# Altium PCB isg_cena_chip_wirebonding_board.PcbDoc
Units mil, origin at the board's own origin, x right, y up, seen from the top; angles counter-clockwise.
Board outline 2000 x 2000 mil, 4 copper layers (Top Layer, MidLayer 1, MidLayer 2, Bottom Layer), stack 23.756 mil thick; 57 components, 62 nets, 327 pads, 262 vias.
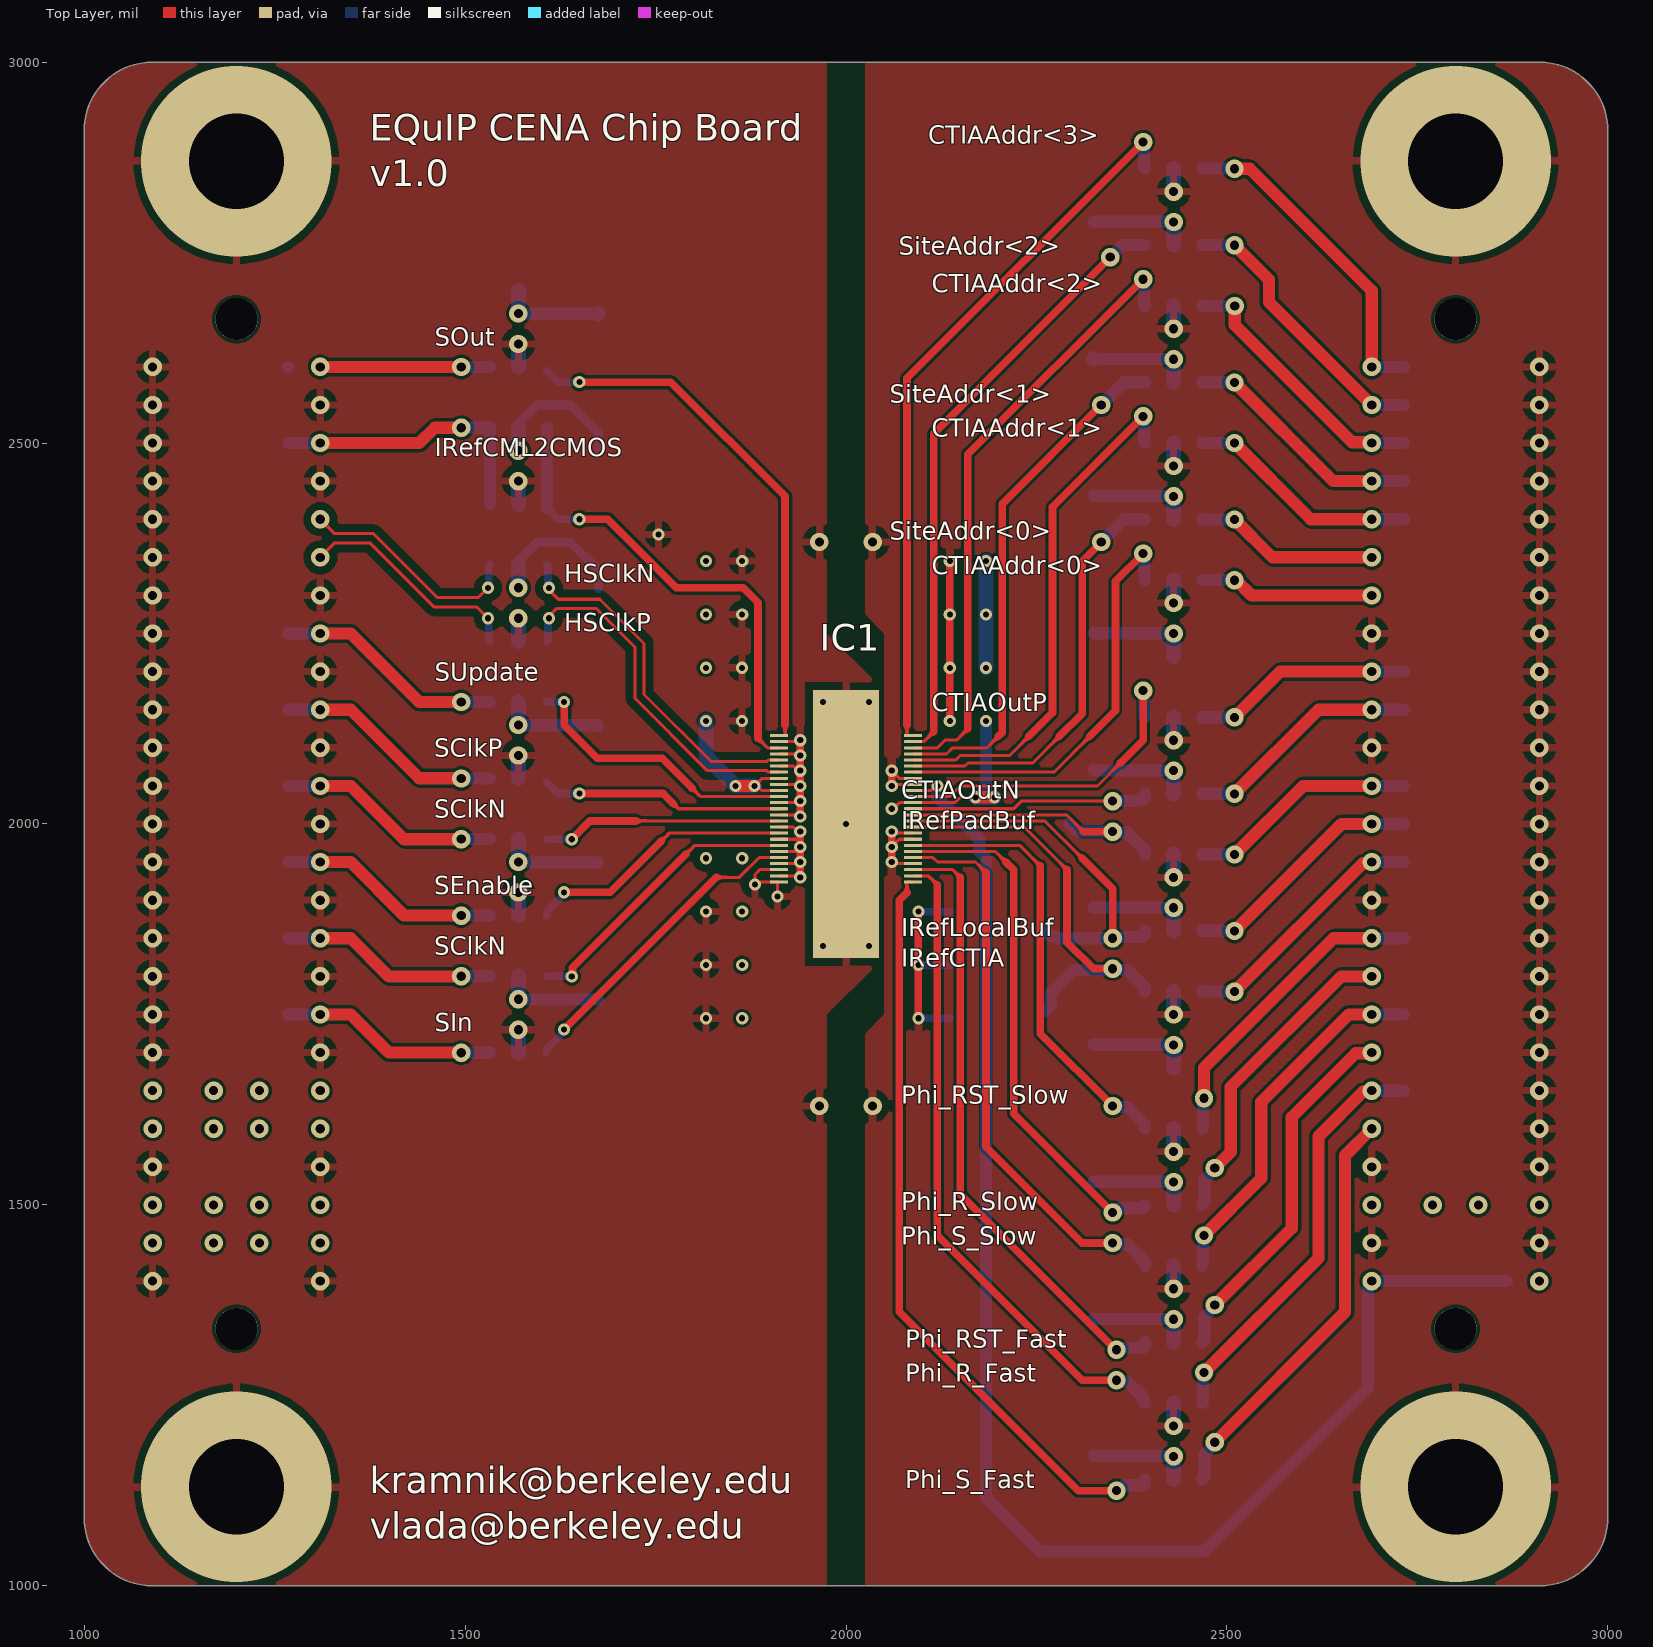
[diagram p0: Top Layer view]
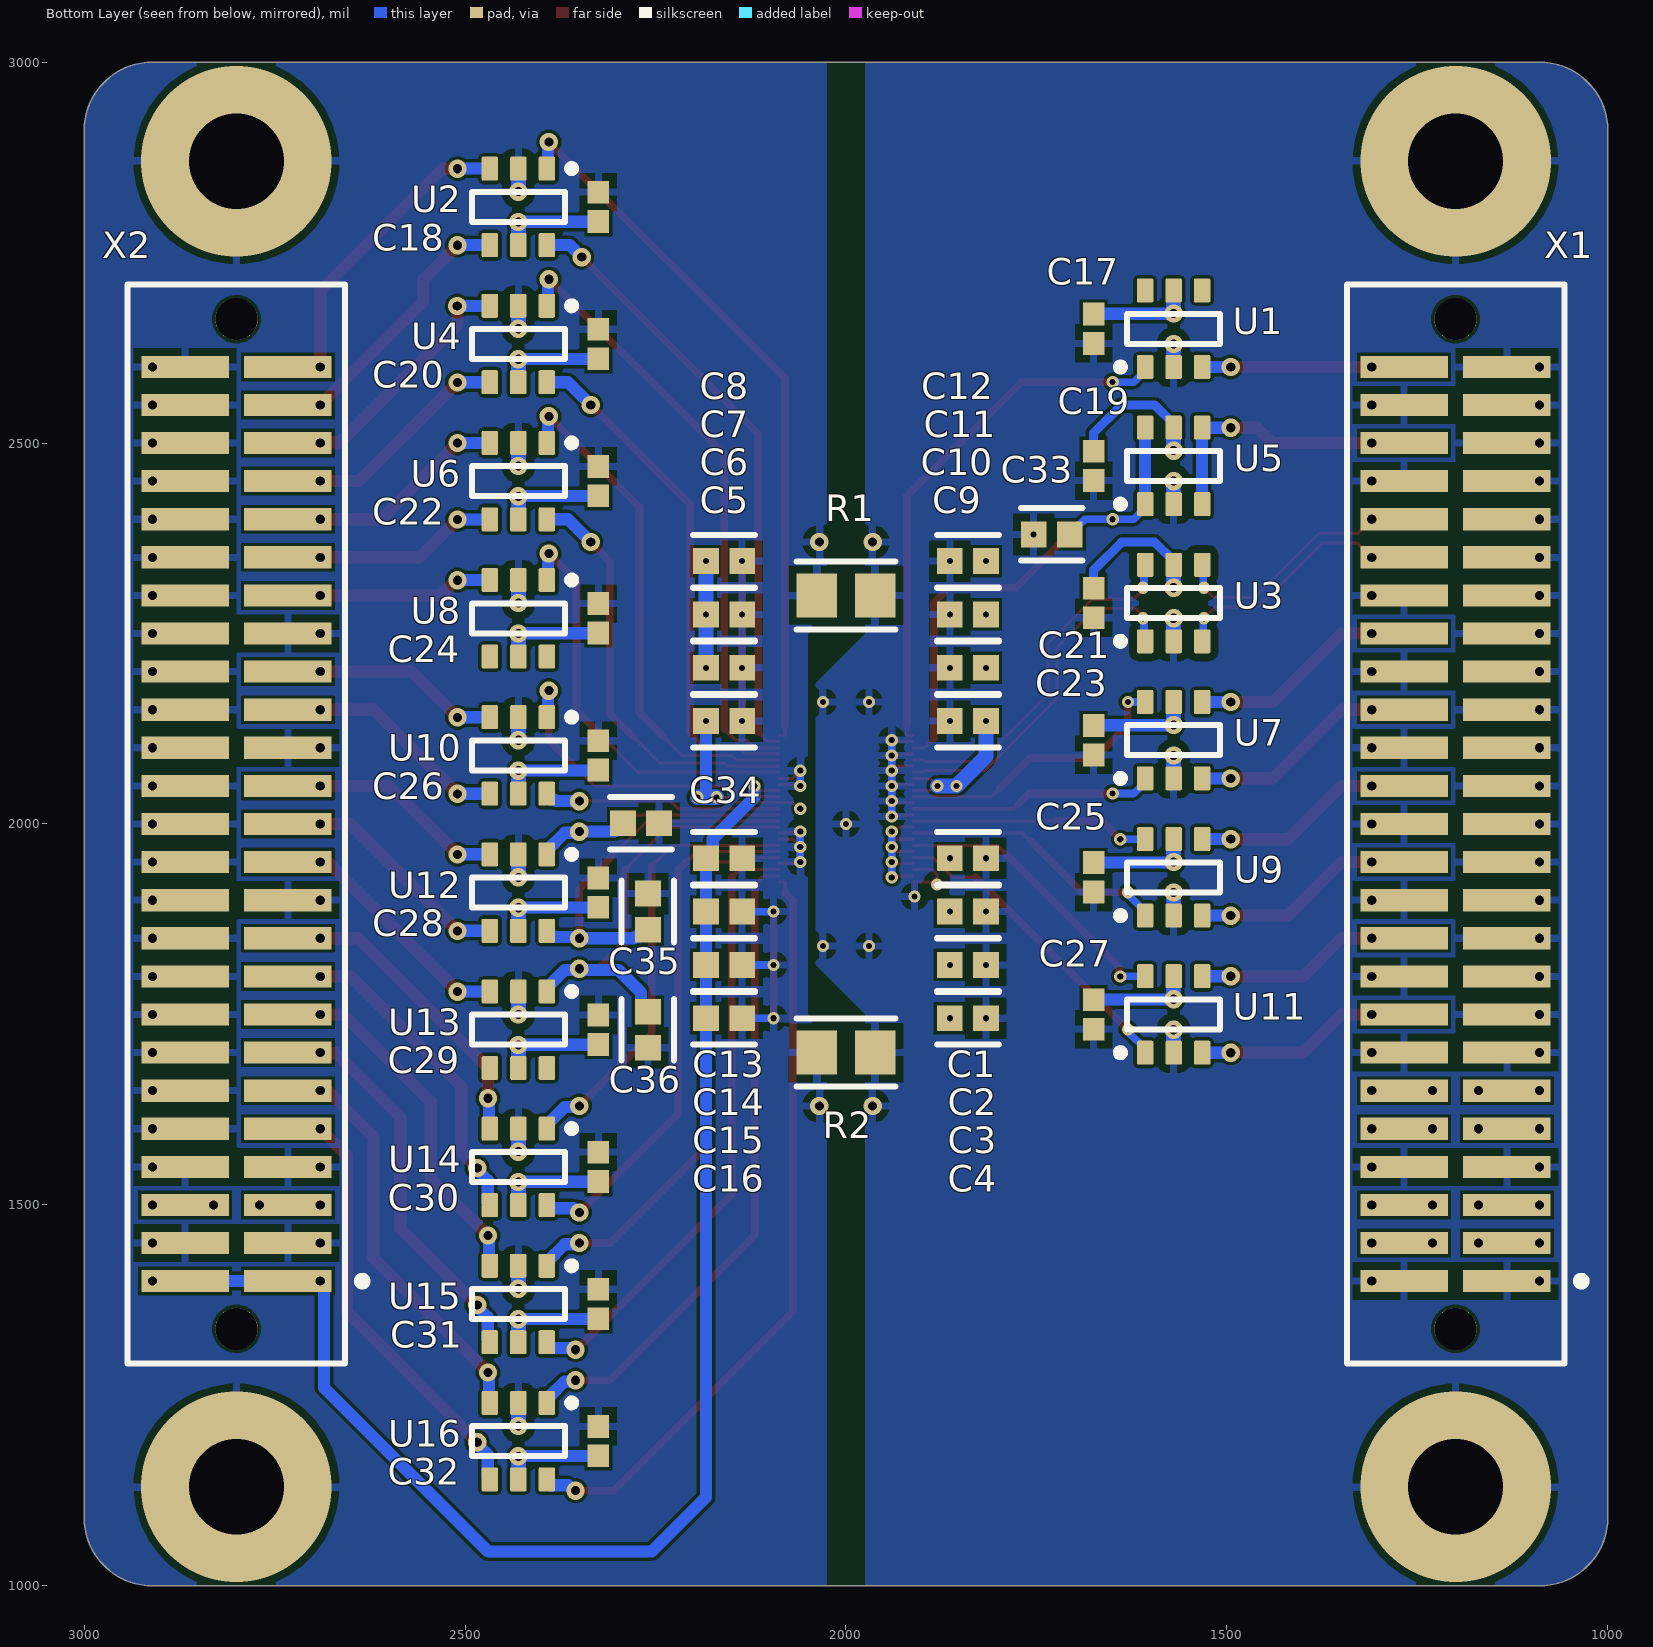
[diagram p1: Bottom Layer view, seen from below]
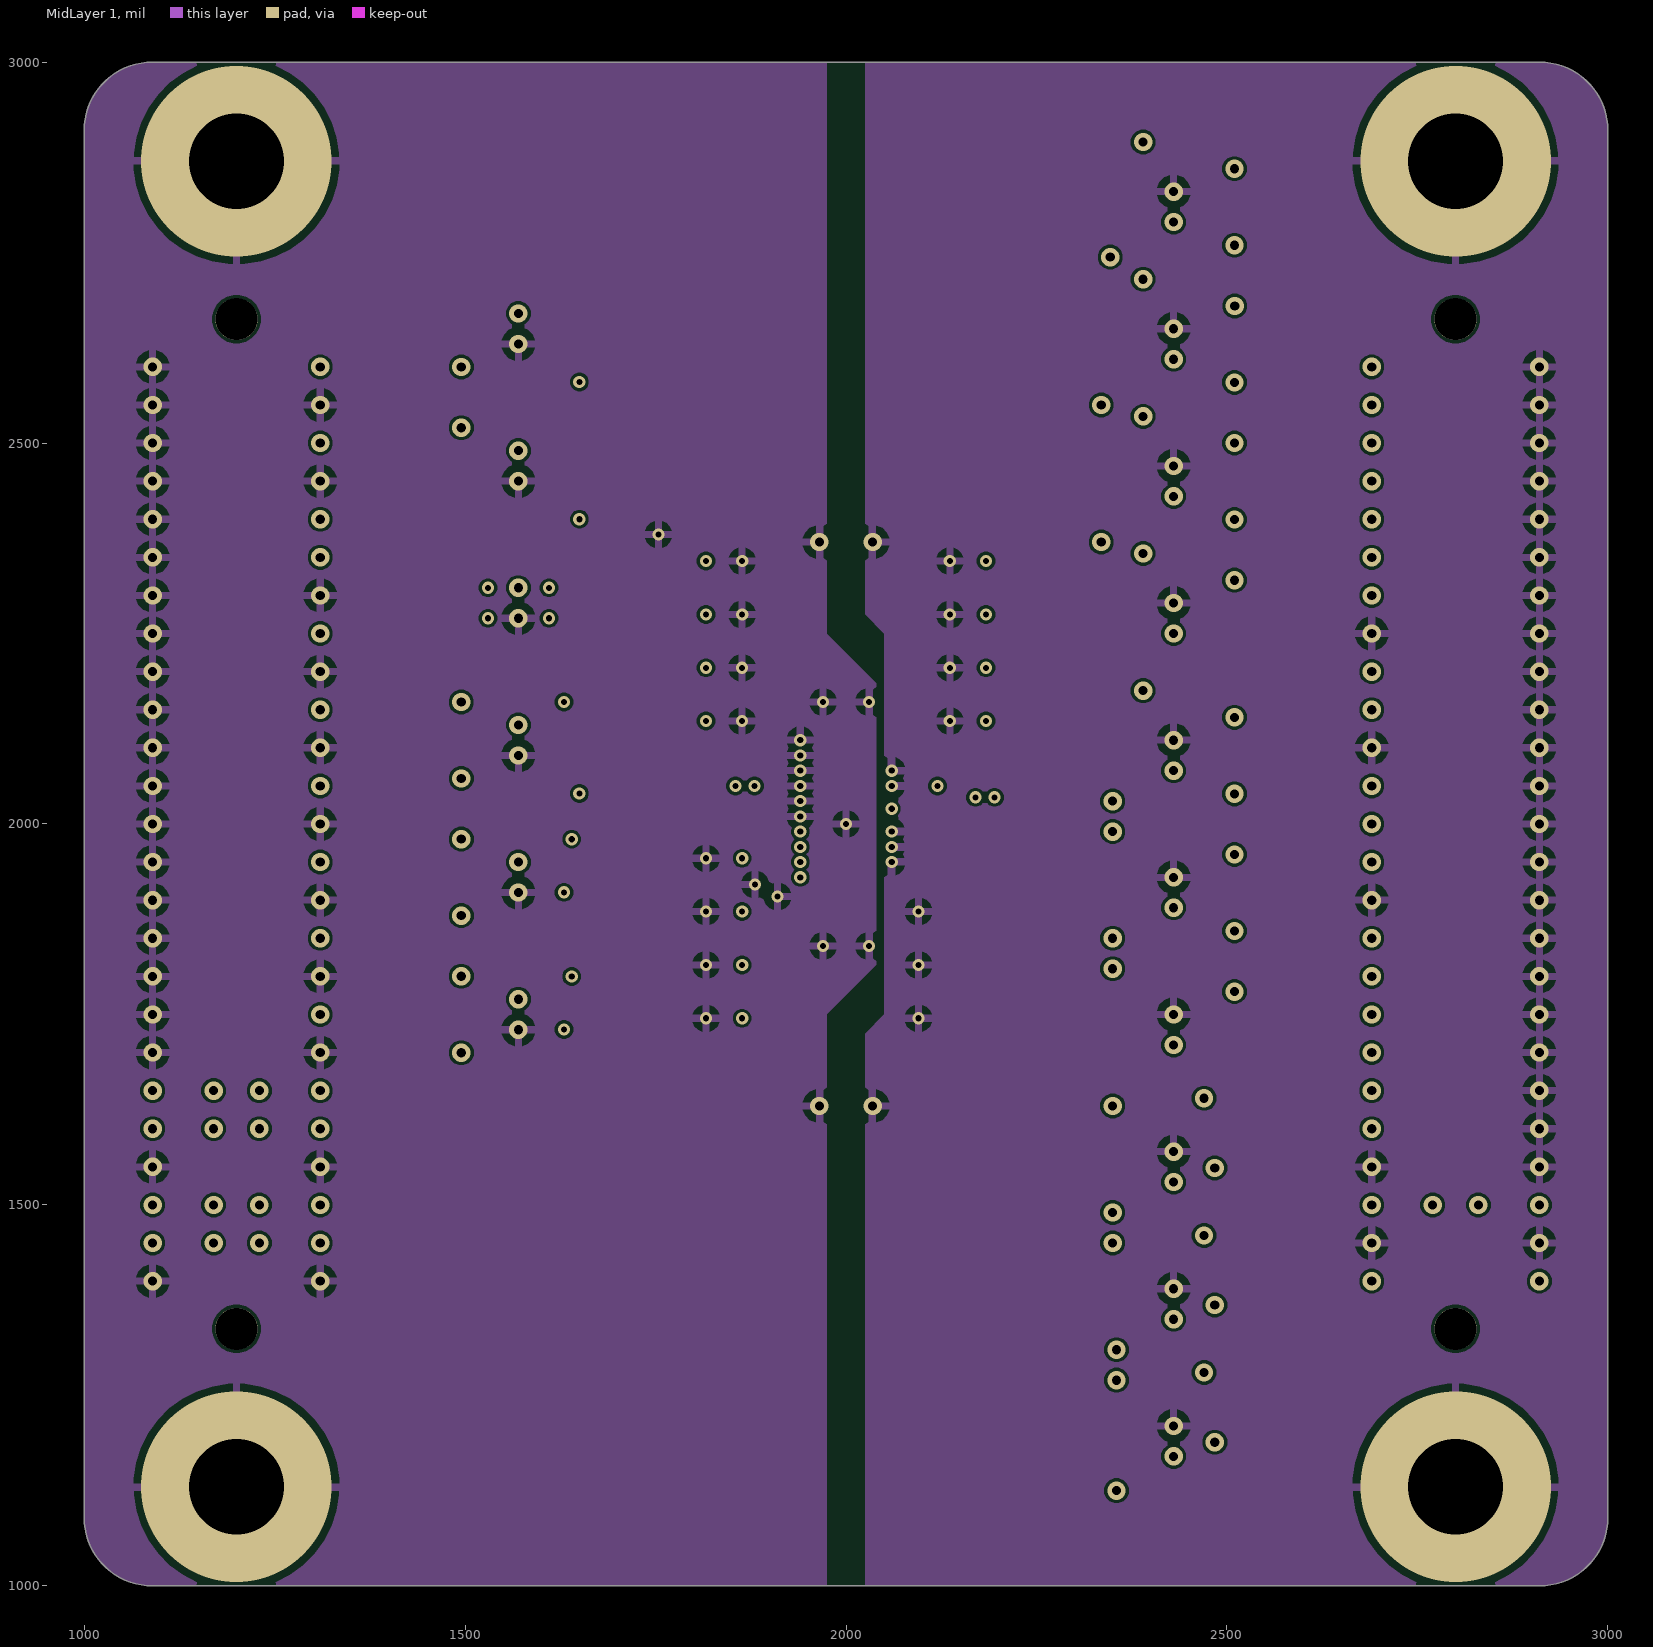
[diagram p2: MidLayer 1]
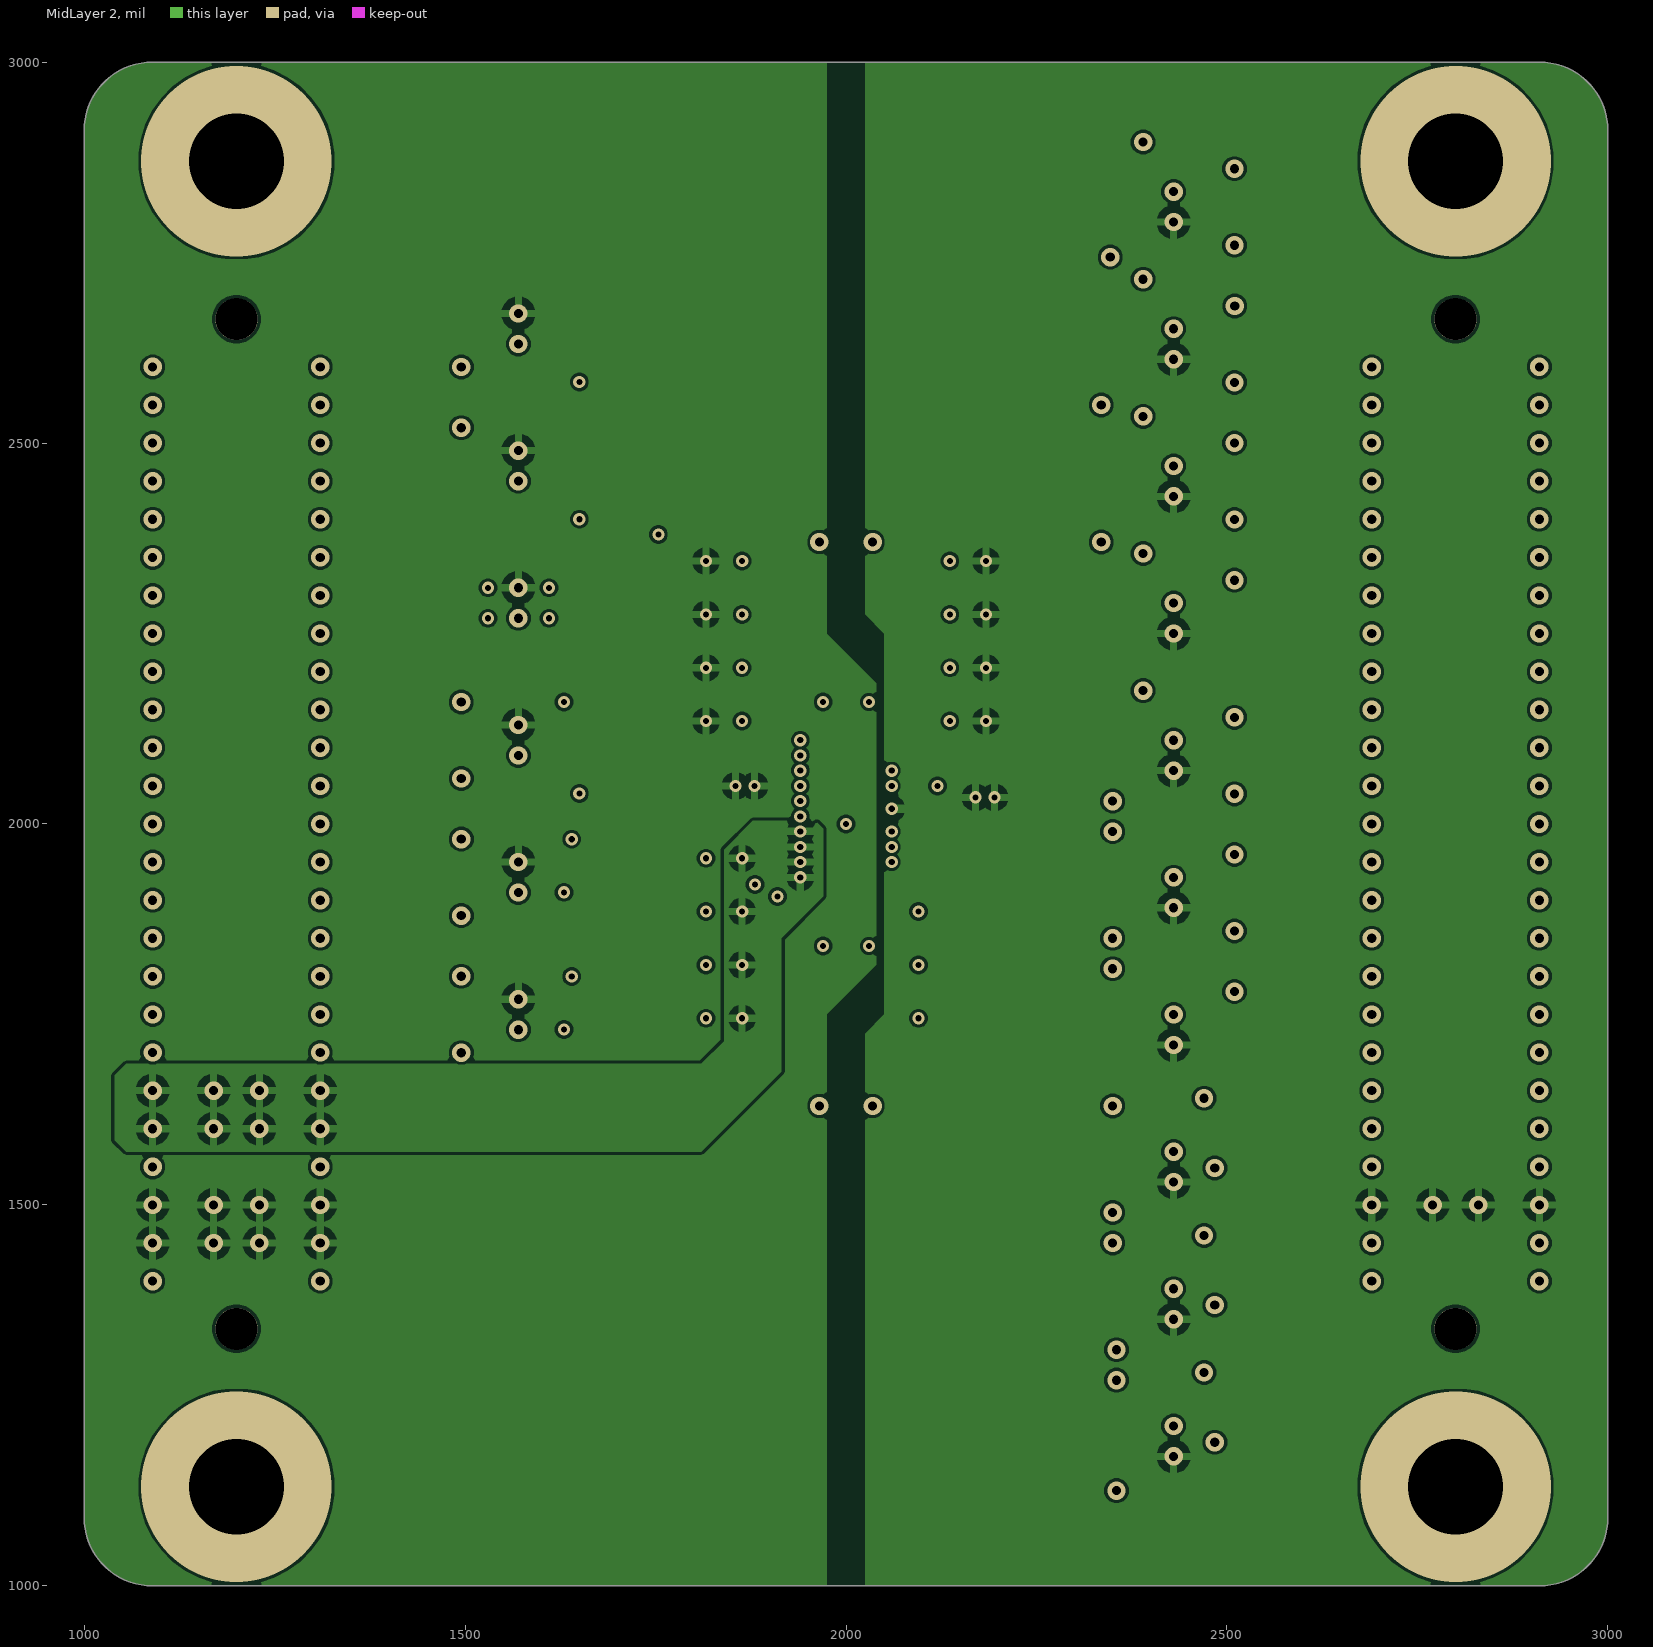
[diagram p3: MidLayer 2]
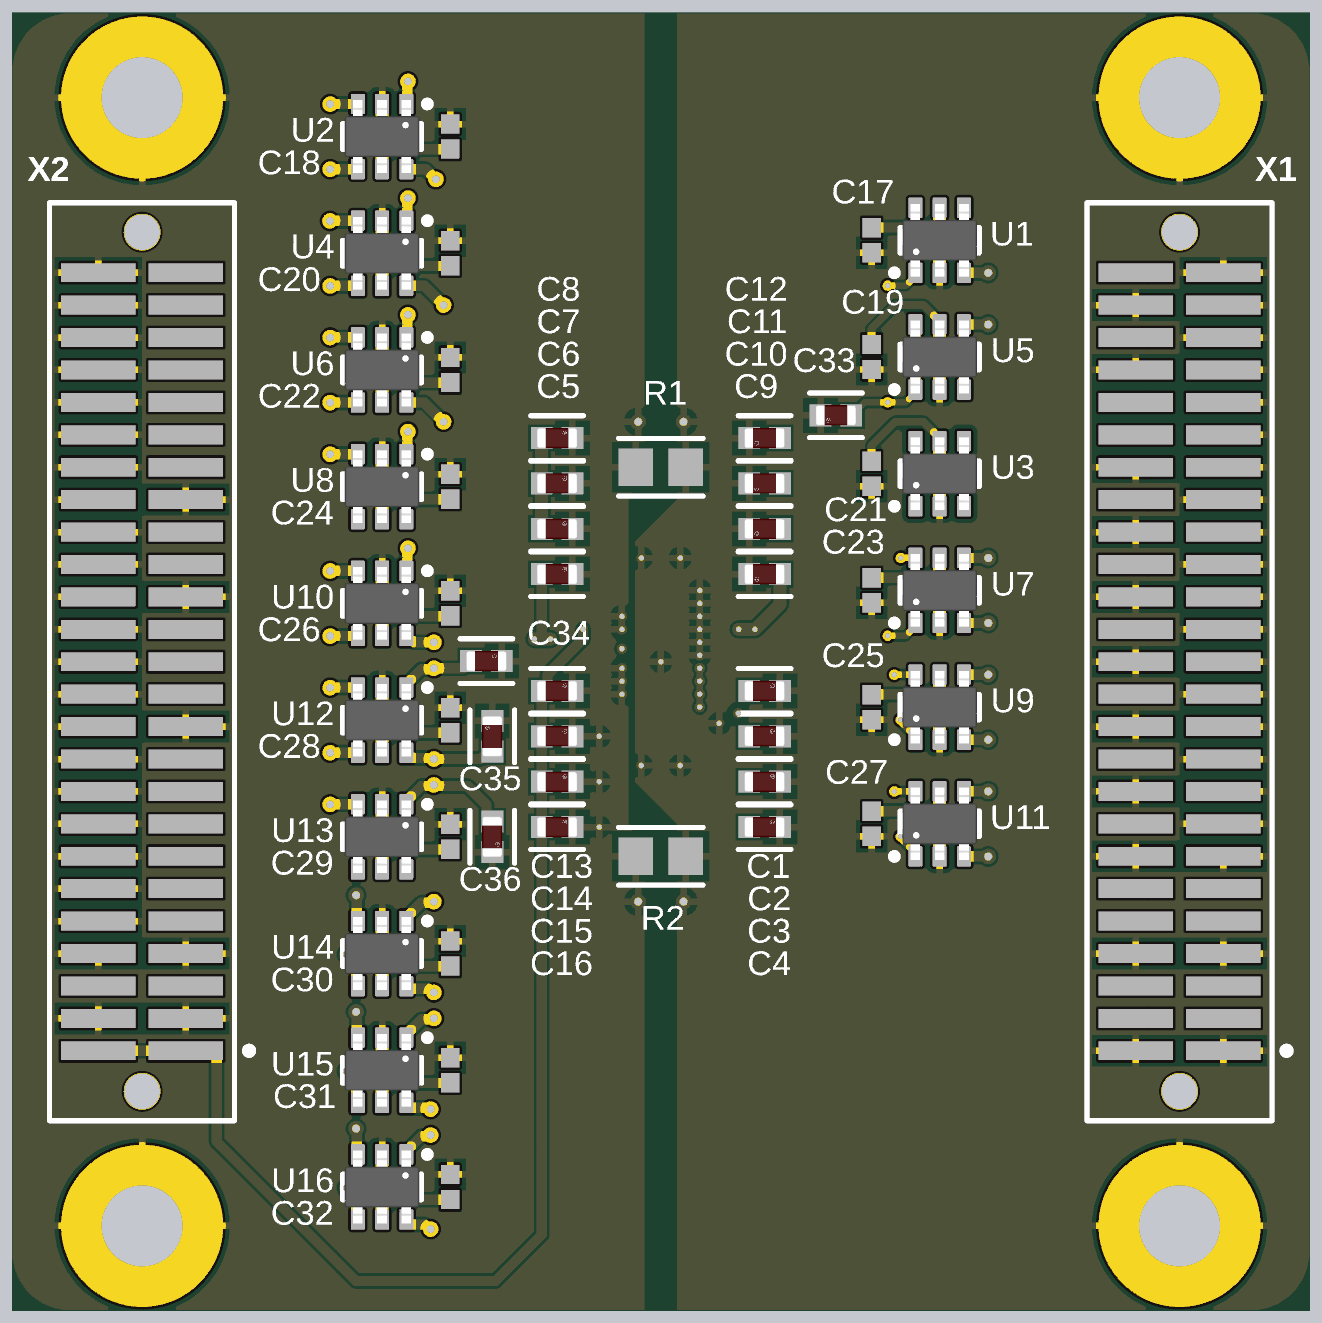
[diagram p4: 3D render of the assembled board from below, using the file's embedded part models]

## Layer stack, top to bottom
Top Solder: solder mask 0.4, Solder Resist, Dk 3.5
Top Layer: signal copper 1.4
Dielectric 2: prepreg 2.8, PP-006, Dk 4.1
MidLayer 1: signal copper 1.378
Dielectric 1: dielectric 12.6, FR-4, Dk 4.8
MidLayer 2: signal copper 1.378
Dielectric 3: prepreg 2.8, PP-006, Dk 4.1
Bottom Layer: signal copper 1.4
Bottom Solder: solder mask 0.4, Solder Resist, Dk 3.5

## Board outline
1000,2910 cw(c1090,2910) 1090,3000 1200,3000 2800,3000 2910,3000 cw(c2910,2910) 3000,2910 3000,1150 3000,1090 cw(c2910,1090) 2910,1000 1090,1000 cw(c1090,1090) 1000,1090

## Design rules (kind name [scope] priority, off if disabled: settings)
Clearance Clearance_1 [InNet('HSClk_N') OR InNet('HSClk_P') OR InNet('HSClk_ESD_N') OR InNet('HSClk_ESD_P') vs InNamedPolygon('TOP_GND') OR InNamedPolygon('BOT_GND')] p1: gap=10 ignorepadtopadclearanceinfootprint=FALSE
Clearance [All] p2: gap=4 ignorepadtopadclearanceinfootprint=FALSE
DiffPairsRouting [All] p1: maxlimit=8 minlimit=8 mostfreqgap=8 toplayer_minwidth=4 toplayer_maxwidth=10 toplayer_prefwidth=4 midlayer1_minwidth=4 midlayer1_maxwidth=10 midlayer1_prefwidth=4 midlayer2_minwidth=4 midlayer2_maxwidth=10 midlayer2_prefwidth=4 bottomlayer_minwidth=4 bottomlayer_maxwidth=10 bottomlayer_prefwidth=4 maxuncoupledlength=500
HoleSize [All] p1: absolutevalues=TRUE maxlimit=100 minlimit=8 maxpercent=80.000 minpercent=20.000
PolygonConnect [All] p1: connectstyle=Relief reliefconductorwidth=10 reliefentries=4 polygonreliefangle="90 Angle" airgapwidth=10
RoutingVias [All] p1: holewidth=12 width=20 viastyle="Through Hole" minholewidth=8 minwidth=16 maxholewidth=125 maxwidth=500
SolderMaskExpansion [All] p1: expansion=4 istentingtop=FALSE
Width [All] p1: maxlimit=1000 minlimit=4 preferedwidth=10
28 further rules are at their usual default settings.

## Classes and differential pairs
differential pair HSClk: +HSClk_P -HSClk_N
differential pair HSClk_ESD: +HSClk_ESD_P -HSClk_ESD_N

## Components (designator, comment, footprint, x,y, rotation, side; value= is the part's Value field where it differs from the comment)
C1 "100n" FP-0603-L_1_6_0_15-W_0_8-IPC_C 1840,1955 r180 bottom
C2 "100n" FP-0603-L_1_6_0_15-W_0_8-IPC_C 1840,1885 r180 bottom
C3 "1u" FP-0603-L_1_6_0_15-W_0_8-IPC_C 1840,1815 r180 bottom
C4 "1u" FP-0603-L_1_6_0_15-W_0_8-IPC_C 1840,1745 r180 bottom
C5 "100n" FP-0603-L_1_6_0_15-W_0_8-IPC_C 2160,2135 r180 bottom
C6 "100n" FP-0603-L_1_6_0_15-W_0_8-IPC_C 2160,2205 r180 bottom
C7 "1u" FP-0603-L_1_6_0_15-W_0_8-IPC_C 2160,2275 r180 bottom
C8 "1u" FP-0603-L_1_6_0_15-W_0_8-IPC_C 2160,2345 r180 bottom
C9 "100n" FP-0603-L_1_6_0_15-W_0_8-IPC_C 1840,2135 r0 bottom
C10 "100n" FP-0603-L_1_6_0_15-W_0_8-IPC_C 1840,2205 r0 bottom
C11 "1u" FP-0603-L_1_6_0_15-W_0_8-IPC_C 1840,2275 r0 bottom
C12 "1u" FP-0603-L_1_6_0_15-W_0_8-IPC_C 1840,2345 r0 bottom
C13 "100n" FP-0603-L_1_6_0_15-W_0_8-IPC_C 2160,1955 r180 bottom
C14 "100n" FP-0603-L_1_6_0_15-W_0_8-IPC_C 2160,1885 r180 bottom
C15 "1u" FP-0603-L_1_6_0_15-W_0_8-IPC_C 2160,1815 r180 bottom
C16 "1u" FP-0603-L_1_6_0_15-W_0_8-IPC_C 2160,1745 r180 bottom
C17 "100n" CAPC1050X55X23ML05T13 1675,2650 r270 bottom
C18 "100n" CAPC1050X55X23ML05T13 2325,2810 r90 bottom
C19 "100n" CAPC1050X55X23ML05T13 1675,2470 r270 bottom
C20 "100n" CAPC1050X55X23ML05T13 2325,2630 r90 bottom
C21 "100n" CAPC1050X55X23ML05T13 1675,2290 r270 bottom
C22 "100n" CAPC1050X55X23ML05T13 2325,2450 r90 bottom
C23 "100n" CAPC1050X55X23ML05T13 1675,2110 r270 bottom
C24 "100n" CAPC1050X55X23ML05T13 2325,2270 r90 bottom
C25 "100n" CAPC1050X55X23ML05T13 1675,1930 r270 bottom
C26 "100n" CAPC1050X55X23ML05T13 2325,2090 r90 bottom
C27 "100n" CAPC1050X55X23ML05T13 1675,1750 r270 bottom
C28 "100n" CAPC1050X55X23ML05T13 2325,1910 r90 bottom
C29 "100n" CAPC1050X55X23ML05T13 2325,1730 r90 bottom
C30 "100n" CAPC1050X55X23ML05T13 2325,1550 r90 bottom
C31 "100n" CAPC1050X55X23ML05T13 2325,1370 r90 bottom
C32 "100n" CAPC1050X55X23ML05T13 2325,1190 r90 bottom
C33 "100n" FP-0603-L_1_6_0_15-W_0_8-IPC_C 1730,2380 r0 bottom
C34 "100n" FP-0603-L_1_6_0_15-W_0_8-IPC_C 2269,2001 r180 bottom
C35 "100n" FP-0603-L_1_6_0_15-W_0_8-IPC_C 2260,1885 r90 bottom
C36 "100n" FP-0603-L_1_6_0_15-W_0_8-IPC_C 2260,1730 r270 bottom
IC1 "" Cena_WB_4/4 2000,2000 r0 top
R1 "RES 1M 0805" FP-ERJ6EN-IPC_A 2000,2300 r0 bottom
R2 "DNP" FP-ERJ6EN-IPC_A 2000,1700 r0 bottom
U1 "TPD2S017DBVR" DBV0006A_L 1570,2650 r90 bottom
U2 "TPD2S017DBVR" DBV0006A_L 2430,2810 r270 bottom
U3 "TPD2S017DBVR" DBV0006A_L 1570,2290 r90 bottom
U4 "TPD2S017DBVR" DBV0006A_L 2430,2630 r270 bottom
U5 "TPD2S017DBVR" DBV0006A_L 1570,2470 r90 bottom
U6 "TPD2S017DBVR" DBV0006A_L 2430,2450 r270 bottom
U7 "TPD2S017DBVR" DBV0006A_L 1570,2110 r90 bottom
U8 "TPD2S017DBVR" DBV0006A_L 2430,2270 r270 bottom
U9 "TPD2S017DBVR" DBV0006A_L 1570,1930 r90 bottom
U10 "TPD2S017DBVR" DBV0006A_L 2430,2090 r270 bottom
U11 "TPD2S017DBVR" DBV0006A_L 1570,1750 r90 bottom
U12 "TPD2S017DBVR" DBV0006A_L 2430,1910 r270 bottom
U13 "TPD2S017DBVR" DBV0006A_L 2430,1730 r270 bottom
U14 "TPD2S017DBVR" DBV0006A_L 2430,1550 r270 bottom
U15 "TPD2S017DBVR" DBV0006A_L 2430,1370 r270 bottom
U16 "TPD2S017DBVR" DBV0006A_L 2430,1190 r270 bottom
X1 "TFM-125-02-X-D-A" SAMTEC-TFM-125-02-X-D-A 1200,2000 r90 bottom
X2 "TFM-125-02-X-D-A" SAMTEC-TFM-125-02-X-D-A 2800,2000 r90 bottom

## Footprints (in the part's own frame and the unit in brackets; to place one, negate y for a bottom-side part, rotate by r counter-clockwise, add the part's x,y. Pads: shape width x height; smd on the part's side, far side on the other; paste and mask are expansions set on the pad)
CAPC1050X55X23ML05T13 [mm] "Chip Capacitor, 2-Leads, Body 1.05x0.55mm, IPC Low Density"
  rect 0.76x0.72 smd: 1(-0.49,0) 2(0.49,0)
  body extent -0.53,-0.28 0.53,0.27, height 0.55
Cena_WB_4/4 [mil]
  rrect50% 24x4 smd paste-100: 1(-88,116) 2(-88,108) 3(-88,100) 4(-88,92) 5(-88,84) 6(-88,76) 7(-88,68) 8(-88,60) 9(-88,52) 10(-88,44) 11(-88,36) 12(-88,28) 13(-88,20) 14(-88,12) 15(-88,4) 16(-88,-4) 17(-88,-12) 18(-88,-20) 19(-88,-28) 20(-88,-36) 21(-88,-44) 22(-88,-52) 23(-88,-60) 24(-88,-68) 25(-88,-76) 26(88,116) 27(88,108) 28(88,100) 29(88,92) 30(88,84) 31(88,76) 32(88,68) 33(88,60) 34(88,52) 35(88,44) 36(88,36) 37(88,28) 38(88,20) 39(88,12) 40(88,4) 41(88,-4) 42(88,-12) 43(88,-20) 44(88,-28) 45(88,-36) 46(88,-44) 47(88,-52) 48(88,-60) 49(88,-68) 50(88,-76)
  rect 86.61x351.57 smd paste-10000: PAD(0,0)
DBV0006A_L [mm] "SOT23, 6-Leads, Body 3.05x1.75mm, Pitch 0.95mm, IPC High Density"
  rrect18% 0.8x0.55 smd: 1(-1.275,0.95) 2(-1.275,0) 3(-1.275,-0.95) 4(1.275,-0.95) 5(1.275,0) 6(1.275,0.95)
  silkscreen extent -1.4,-1.55 0.5,1.9, body extent -1.42,-1.46 1.42,1.46, height 1.11
FP-0603-L_1_6_0_15-W_0_8-IPC_C [mil]
  rect 33.77x33.94 smd paste+0 mask+0: 1(-23.71,0) 2(23.71,0)
  silkscreen extent -41,-34 41,34, body extent -31,-16 31,16, height 37
FP-ERJ6EN-IPC_A [mil]
  rect 53.34x57.56 smd paste+0 mask+0: 1(-38.41,0) 2(38.41,0)
  silkscreen extent -65,-45 65,45
SAMTEC-TFM-125-02-X-D-A [mm]
  rect 0.74x2.92 smd: 1(-15.24,-1.714) 2(-15.24,1.714) 3(-13.97,-1.714) 4(-13.97,1.714) 5(-12.7,-1.714) 6(-12.7,1.714) 7(-11.43,-1.714) 8(-11.43,1.714) 9(-10.16,-1.714) 10(-10.16,1.714) 11(-8.89,-1.714) 12(-8.89,1.714) 13(-7.62,-1.714) 14(-7.62,1.714) 15(-6.35,-1.714) 16(-6.35,1.714) 17(-5.08,-1.714) 18(-5.08,1.714) 19(-3.81,-1.714) 20(-3.81,1.714) 21(-2.54,-1.714) 22(-2.54,1.714) 23(-1.27,-1.714) 24(-1.27,1.714) 25(0,-1.714) 26(0,1.714) 27(1.27,-1.714) 28(1.27,1.714) 29(2.54,-1.714) 30(2.54,1.714) 31(3.81,-1.714) 32(3.81,1.714) 33(5.08,-1.714) 34(5.08,1.714) 35(6.35,-1.714) 36(6.35,1.714) 37(7.62,-1.714) 38(7.62,1.714) 39(8.89,-1.714) 40(8.89,1.714) 41(10.16,-1.714) 42(10.16,1.714) 43(11.43,-1.714) 44(11.43,1.714) 45(12.7,-1.714) 46(12.7,1.714) 47(13.97,-1.714) 48(13.97,1.714) 49(15.24,-1.714) 50(15.24,1.714)
  round 1.4 hole 1.4: MH1(-16.828,0) MH2(16.828,0)
  silkscreen extent -17.98,-4.32 17.98,3.63

## Part data
C1 C2 C3 C4 C5 C6 C7 C8 C9 C10 C11 C12 C13 C14 C15 C16 C33 C34 C35 C36: library part CMP-2000-07531-4, "Ceramic Capacitor General Use 1uF ±10% 50V X7R 0603", Capacitance=1uF, Case Code (Imperial)=0603, Case Code (Metric)=1608, Dielectric=X7R, Max Operating Temperature=125°C, Min Operating Temperature=-55°C, Package Quantity=1, Tolerance=10%, Voltage Rating=50V, Case/Package=0603, Construction=Flat, Depth=0.8mm, Halogen Free="Halogen Free", Height=0.8mm, Length=1.6mm, Mount="Surface Mount", Packaging="Tape and Reel", Radiation Hardening=No, RoHS Compliant=Yes, Series=M, Termination=SMD/SMT, Thickness=0.037inch, Voltage Rating (DC)=50V, Width=0.031inch
C17 C18 C19 C20 C21 C22 C23 C24 C25 C26 C27 C28 C29 C30 C31 C32: library part CMP-2000-05439-1, "Chip Capacitor, 100 nF, +/- 10%, 16 V, -55 to 125 degC, 0402 (1005 Metric), RoHS, Tape and Reel", Capacitance=100000pF, Case Size/Dimension=0402, Dielectric=X7R, Manufacturer="Samsung Electro-Mechanics", Rated Voltage=16V, Tolerance (%)=±10%, Datasheet URL=https://datasheet.ciiva.com/29198/458718-da-01-en-vs-kondensator-0402-29198423.pdf, Datasheet Version=Nov-10, Manufacturer URL=http://www.samsungsem.com/global/index.jsp
IC1: library part Cena
R1: library part CMP-2001-04378-6, "RES SMD 1M OHM 1% 1/8W 0805", Case Code (Imperial)=0805, Case Code (Metric)=2012, Max Operating Temperature=155°C, Max Power Dissipation=125mW, Min Operating Temperature=-55°C, Package Quantity=1, Resistance=1MR, Resistance Tolerance=1%, Resistor Type="Thick Film", Temperature Coefficient=100ppm/°C, Voltage Rating=150V, Case/Package=0805, Construction=Rectangular, Contact Plating=Tin, Depth=1.25mm, Features="Automotive AEC-Q200", Height=0.6mm, Lead Free="Lead Free", Length=2mm, Military Standard=Not, Mount="Surface Mount", Number of Pins=2, Number of Terminations=2, Packaging="Tape and Reel", Power Rating=125mW, Radiation Hardening=No, REACH SVHC="No SVHC", RoHS Compliant=Yes, Series=ERJ, Size Code=0805, Technology="THICK FILM", Termination=SMD/SMT, Tolerance=1%, Voltage Rating (DC)=150V, Width=1.2mm
R2: library part CMP-2001-04378-6, Case Code (Imperial)=0805, Case Code (Metric)=2012, Max Operating Temperature=155°C, Max Power Dissipation=125mW, Min Operating Temperature=-55°C, Package Quantity=1, Resistance=1MR, Resistance Tolerance=1%, Resistor Type="Thick Film", Temperature Coefficient=100ppm/°C, Voltage Rating=150V, Case/Package=0805, Construction=Rectangular, Contact Plating=Tin, Depth=1.25mm, Features="Automotive AEC-Q200", Height=0.6mm, Lead Free="Lead Free", Length=2mm, Military Standard=Not, Mount="Surface Mount", Number of Pins=2, Number of Terminations=2, Packaging="Tape and Reel", Power Rating=125mW, Radiation Hardening=No, REACH SVHC="No SVHC", RoHS Compliant=Yes, Series=ERJ, Size Code=0805, Technology="THICK FILM", Termination=SMD/SMT, Tolerance=1%, Voltage Rating (DC)=150V, Width=1.2mm
U1 U2 U3 U4 U5 U6 U7 U8 U9 U10 U11 U12 U13 U14 U15 U16: library part CMP-0326-00057-3, "Ultra-Low Clamp Voltage ESD Solution with Series-Resistor Isolation, 2 Channels, -40 to 85 degC, 6-pin SOT-23 (DBV), Green (RoHS & no Sb/Br)", Breakdown Voltage(Min)(V)=11, Differential Capacitance(pF)=0.02, IO Capacitance(Typ)(pF)=1, IO Leakage Current(nA)=10, Manufacturer="Texas Instruments", ComponentLink1Description="Manufacturer URL", ComponentLink1URL=http://www.ti.com/, ComponentLink2Description=Datasheet, ComponentLink2URL=http://www.ti.com/general/docs/lit/getliterature.tsp?genericPartNumber=TPD2S017&fileType=pdf, ComponentLink3Description="URL Link1", ComponentLink3URL=SamplesURL:http://www.ti.com/product/tpd2s017#samples, DatasheetVersion=SLLS949, Eco-Plan="Green (RoHS & no Sb/Br)", IEC 61000-4-2 Contact(+/- kV)=11, Mounting Technology="Surface Mount", PackageDescription="6-Pin Plastic Small-Outline Package, 2.9 x 1.6 mm Body, 0.95 mm Pitch, 2.8 mm Lead Span", PackageReference=DBV0006A, PackageVersion="revK, Mar-2006", PartNumber=TPD2S017DBVR, SubFamily="ESD Solution", USB Full Speed=TRUE, USB High Speed=TRUE
X1 X2: "SAMTEC TFM-125-02-X-D-A"

## Via types
v1: diameter 24, hole 12, Top Layer to Bottom Layer, tented both sides, 146 vias
v2: diameter 16, hole 8, Top Layer to Bottom Layer, tented both sides, 56 vias
v3: diameter 24, hole 12, Top Layer to Bottom Layer, 44 vias
v4: diameter 16, hole 8, Top Layer to Bottom Layer, 12 vias
v5: diameter 250, hole 125, Top Layer to Bottom Layer, 4 vias

## Nets (pads, with @x,y where several pads share a name; then routed paths per layer and width w, separated by ;. In a path a pad name is that pad's centre, name@x,y a point inside that pad or via, vN(x,y) a via of type N, cw(c..) or ccw(c..) an arc to the next point about the centre after c; other vN are vias at no path point)
AVDD: C5.1 C6.1 C7.1 C8.1 C18.1 C20.1 C22.1 C24.1 C26.1 C28.1 C29.1 C30.1 C31.1 C32.1 IC1.37 U2.5 U4.5 U6.5 U8.5 U10.5 U12.5 U13.5 U14.5 U15.5 U16.5 X2.5 X2.6 | length 1761.1
  Top Layer w4: v2(2060,2020) 2062,2020 2070,2028 IC1.37 2142.61,2028 2149.23,2034.62 2169.62,2034.62 v2(2170,2035)
  Top Layer w16: v2(2170,2035) v2(2195,2035)
  Bottom Layer w16: 2183.71,2035 v2(2183.71,2135) ; C32.1 2325.35,1170.35 2429.65,1170.35 v1(2430,1170) ; C31.1 2325.35,1350.35 2429.65,1350.35 v1(2430,1350) ; C30.1 2325.35,1530.35 2429.65,1530.35 v1(2430,1530) ; C29.1 2325.35,1710.35 2429.65,1710.35 v1(2430,1710) ; C28.1 2325.35,1890.35 2429.65,1890.35 v1(2430,1890) ; C26.1 2325.35,2070.35 2429.65,2070.35 v1(2430,2070) ; C24.1 2325.35,2250.35 2429.65,2250.35 v1(2430,2250) ; C22.1 2325.35,2430.35 2429.65,2430.35 v1(2430,2430) ; C18.1 2325.35,2790.35 2429.65,2790.35 v1(2430,2790) ; C20.1@2325.35,2610.35 v1@2429.65,2610.35
  Bottom Layer w20: v2(2170,2035) 2183.71,2035 v2(2195,2035) ; v2(2183.71,2205) v2(2183.71,2275) v2(2183.71,2345) ; C20.1 C20.1@2325.35,2610.35 ; v1@2429.65,2610.35 v1(2430,2610) U4.5 ; U16.5 v1(2430,1170) ; U15.5 v1(2430,1350) ; U14.5 v1(2430,1530) ; U13.5 v1(2430,1710) ; U12.5 v1(2430,1890) ; U10.5 v1(2430,2070) ; U8.5 v1(2430,2250) ; U6.5 v1(2430,2430) ; U2.5 v1(2430,2790)
  other v1: 2690,1500 2770,1500 2830,1500 2910,1500
CTIAAddr<0>: U8.3 X2.37 | length 228.9
  Top Layer w16: v3@2512.26,2319.9 2532.16,2300 v1(2690,2300)
  Bottom Layer w16: U8.3@2467.2,2320.39 U8.3 v3@2510,2320.2
  other v3: 2510,2320
CTIAAddr<0>_ESD: IC1.32 U8.1 | length 556.3
  Top Layer w4: IC1.32 2273,2068 2320,2115
  Top Layer w10: 2320,2115 2353.66,2148.66 2353.66,2318.66 v3(2390,2355)
  Bottom Layer w16: v3(2390,2355) 2391.3,2353.7 2391.3,2321.5 U8.1
CTIAAddr<1>: U6.3 X2.41 | length 306.8
  Top Layer w16: v3(2510,2500) 2610,2400 v1(2690,2400)
  Bottom Layer w16: U6.3@2467.2,2500.39 U6.3 v3@2510,2500.2 ; v1(2690,2400) X2.41
CTIAAddr<1>_ESD: IC1.30 U6.1 | length 682.9
  Top Layer w4: IC1.30 2144,2084 2150,2090 2215,2090 2240,2115
  Top Layer w10: 2240,2115 2271,2146 2271,2416 v3(2390,2535)
  Bottom Layer w16: v3(2390,2535) 2391.3,2533.7 2391.3,2501.5 U6.1
CTIAAddr<2>: U4.3 X2.45 | length 354.3
  Top Layer w16: v3(2510.2,2679.8) 2510.2,2654.8 2664,2501 2689,2501 v1(2690,2500)
  Bottom Layer w16: U4.3 2467.6,2680 v3@2510.2,2680 ; v1(2690,2500) X2.45
CTIAAddr<2>_ESD: IC1.28 U4.1 | length 803.5
  Top Layer w4: IC1.28 2120,2100 2130,2110 2145,2110 2160,2125
  Top Layer w10: 2160,2125 2160,2485 v3(2390,2715)
  Bottom Layer w16: v3(2390,2715) 2391.3,2713.7 2391.3,2681.5 U4.1
CTIAAddr<3>: U2.3 X2.49 | length 434.1
  Top Layer w16: v3(2510,2860) 2530,2860 2690,2700 v1(2690,2600)
  Bottom Layer w16: U2.3 v3@2510,2860.2 ; X2.49@2690,2606.57 2696.57,2600 X2.49
CTIAAddr<3>_ESD: IC1.26 U2.1 | length 951.3
  Top Layer w4: 2080,2130 2080,2116 IC1.26
  Top Layer w10: 2080,2130 2080,2585 v3(2390,2895)
  Bottom Layer w16: v3(2390,2895) 2391.3,2893.7 2391.3,2861.5 U2.1
CTIAOutN: U10.4 X2.31 | length 313.5
  Top Layer w16: v3@2512.16,2039.61 v3(2510,2039.61) 2510,2040 2620,2150 v1(2690,2150)
  Bottom Layer w16: U10.4@2467.2,2040 U10.4 v3@2510,2039.8 ; v1(2690,2150) X2.31
CTIAOutN_ESD: IC1.38 U10.6 | length 315.7
  Top Layer w4: IC1.38 2220,2020 2230,2030 v3(2350,2030)
  Bottom Layer w16: v3(2350,2030) 2380.4,2030 2382.45,2032.06 2389.77,2032.06 2392.6,2034.88 U10.6
CTIAOutP: U10.3 X2.33 | length 290.2
  Top Layer w16: v3(2510,2140) 2570,2200 v1(2690,2200)
  Bottom Layer w16: U10.3@2467.2,2140.39 U10.3 v3@2510,2140.2 ; v1(2690,2200) X2.33
CTIAOutP_ESD: IC1.36 U10.1 | length 433.5
  Top Layer w4: IC1.36 2136,2036 2150,2050 2330,2050 2360,2080
  Top Layer w10: 2360,2080 2390,2110 v3(2390,2175)
  Bottom Layer w16: v3(2390,2175) 2391.3,2173.7 2391.3,2141.5 U10.1
GND: C1.2 C2.2 C3.2 C4.2 C9.2 C10.2 C11.2 C12.2 C17.2 C19.2 C21.2 C23.2 C25.2 C27.2 C33.2 IC1.2 IC1.4 IC1.6 IC1.9 IC1.12 IC1.14 IC1.23 IC1.25 IC1.PAD R1.1 R2.1 U1.2 U3.2 U5.2 U7.2 U9.2 U11.2 X1.1 X1.2 X1.7 X1.8 X1.13 X1.14 X1.15 X1.17 X1.18 X1.19 X1.21 X1.22 X1.23 X1.25 X1.26 X1.27 X1.29 X1.30 X1.31 X1.33 X1.34 X1.35 X1.37 X1.38 X1.39 X1.41 X1.43 X1.44 X1.45 X1.47 X1.48 X1.49 | length 654.8
  Top Layer w4: v2(1910,1905) IC1.25@1910,1924 ; IC1.25 IC1.25@1910,1924 ; IC1.23 1886.84,1940 1880.59,1933.76 v2(1880.59,1920.55) 1883.84,1920.55 1887.29,1924 IC1.25@1910,1924 ; IC1.14 1938,2012 v2(1940,2010) ; IC1.12 1938,2028 v2(1940,2030) ; IC1.9 1938,2052 v2(1940,2050) ; IC1.6 1930.75,2076 1936.75,2070 v2(1940,2070) ; IC1.4 1938,2092 v2(1940,2090) ; IC1.2 1938,2108 v2(1940,2110)
  Top Layer w10: v2(1940,2010) v2(1940,2030) v2(1940,2050) v2(1940,2070) v2(1940,2090) v2(1940,2110)
  Bottom Layer w10: v2(1940,2010) v2(1940,2030) v2(1940,2050) v2(1940,2070) v2(1940,2090) v2(1940,2110)
  Bottom Layer w20: U11.2 v1(1570,1730) ; U9.2 v1(1570,1910) ; U7.2 v1(1570,2090) ; U3.2 v1(1570,2270) ; U5.2 v1(1570,2450) ; U1.2 v1(1570,2630)
  other v1: 1090,1400 1310,1400 1090,1550 1310,1550 1965,1630 1090,1700 1310,1700 1090,1750 1090,1800 1310,1800 1090,1850 1090,1900 1310,1900 1090,1950 1090,2000 1310,2000 1090,2050 1090,2100 1310,2100 1090,2150 1090,2200 1310,2200 1090,2250 1090,2300 1310,2300 1090,2350 1965,2370 1090,2400 1090,2450 1310,2450 1090,2500 1090,2550 1310,2550 1090,2600
  other v2: 1816.29,1745 1816.29,1815 1970,1840 2030,1840 1816.29,1885 1816.29,1955 2000,2000 1863.59,2135 1970,2160 2030,2160 1863.59,2205 1863.71,2275 1863.71,2345 1753.71,2380
  other v5: 1200,1130 1200,2870
GNDA: C5.2 C6.2 C7.2 C8.2 C13.2 C14.2 C15.2 C16.2 C18.2 C20.2 C22.2 C24.2 C26.2 C28.2 C29.2 C30.2 C31.2 C32.2 C34.2 C35.2 C36.2 IC1.33 IC1.34 IC1.42 IC1.43 IC1.47 R1.2 R2.2 U2.2 U4.2 U6.2 U8.2 U10.2 U12.2 U13.2 U14.2 U15.2 U16.2 X2.3 X2.4 X2.7 X2.8 X2.10 X2.12 X2.14 X2.16 X2.18 X2.20 X2.21 X2.22 X2.24 X2.26 X2.28 X2.29 X2.30 X2.32 X2.34 X2.35 X2.36 X2.38 X2.40 X2.42 X2.44 X2.46 X2.48 X2.50 | length 1046.6
  Top Layer w4: v2(2060,1950) 2062,1948 IC1.47 ; v2(2060,1970) 2070,1980 IC1.43 ; v2(2060,1990) 2062,1988 IC1.42 ; v2(2060,2050) 2062,2052 IC1.34 ; v2(2060,2070) 2070,2060 IC1.33
  Top Layer w10: v2(2060,1950) v2(2060,1970) v2(2060,1990) ; v2(2060,2050) v2(2060,2070) ; v2(2095,1745) v2(2095,1815) v2(2095,1885) ; v2(2136.29,2135) v2(2136.29,2205) v2(2136.29,2275) v2(2136.29,2345)
  Bottom Layer w10: v2(2060,1950) v2(2060,1970) v2(2060,1990) ; v2(2060,2050) v2(2060,2070) ; v2(2095,1745) C16.2 ; v2(2095,1815) C15.2 ; v2(2095,1885) C14.2
  Bottom Layer w20: v1(2430,1210) U16.2 ; v1(2430,1390) U15.2 ; v1(2430,1570) U14.2 ; v1(2430,1750) U13.2 ; v1(2430,1930) U12.2 ; v1(2430,2110) U10.2 ; v1(2430,2290) U8.2 ; v1(2430,2470) U6.2 ; v1(2430,2650) U4.2 ; v1(2430,2830) U2.2
  other v1: 2690,1450 2910,1450 2690,1550 2910,1550 2910,1600 2035,1630 2910,1650 2910,1700 2910,1750 2910,1800 2910,1850 2690,1900 2910,1900 2910,1950 2910,2000 2910,2050 2690,2100 2910,2100 2910,2150 2910,2200 2690,2250 2910,2250 2910,2300 2910,2350 2035,2370 2910,2400 2910,2450 2910,2500 2910,2550 2910,2600
  other v5: 2800,1130 2800,2870
HSClk_ESD_N: IC1.5 U3.6 | length 469.3
  Top Layer w4: v4(1610,2310) 1610,2307.44 1622.44,2295 1676.97,2295 1680.49,2291.49 1735,2236.97 1735,2170 1823,2082 1896,2082 1898,2084 IC1.5
  Bottom Layer w10: U3.6 1608.85,2338.75 1608.85,2311.15 v4(1610,2310)
HSClk_ESD_P: IC1.7 U3.1 | length 468.4
  Top Layer w4: v4(1610,2270) 1610,2272.56 1620.44,2283 1672,2283 1723,2232 1723,2165.03 1818.03,2070 1896,2070 1898,2068 IC1.7
  Bottom Layer w10: U3.1 1608.85,2241.25 1608.85,2268.85 v4(1610,2270)
HSClk_N: U3.4 X1.42 | length 299.3
  Top Layer w4: v1(1310,2400) 1329,2381 1379.97,2381 1463.97,2297 1517,2297 v4(1530,2310)
  Bottom Layer w10: v4(1530,2310) 1531.15,2311.15 1531.15,2338.75 U3.4
HSClk_P: U3.3 X1.40 | length 300.2
  Top Layer w4: v1(1310,2350) 1329,2369 1375,2369 1459,2285 1515,2285 v4(1530,2270)
  Bottom Layer w10: v4(1530,2270) 1531.15,2268.85 1531.15,2241.25 U3.3
HVDD: C1.1 C2.1 C3.1 C4.1 IC1.16 IC1.18 IC1.20 IC1.22 IC1.24 X1.9 X1.10 X1.11 X1.12 | length 264.1
  Top Layer w4: IC1.24 1938,1932 v2(1940,1930) ; IC1.22 1938,1948 v2(1940,1950) ; IC1.20 v2@1940,1964 ; IC1.18 1940,1980 ; IC1.16 1930.75,1996 1936.75,1990 v2(1940,1990)
  Top Layer w10: v2(1940,1930) v2(1940,1950) 1940,1964 v2(1940,1970) 1940,1980 v2(1940,1990)
  Bottom Layer w10: v2(1940,1930) v2(1940,1950) v2(1940,1970) v2(1940,1990)
  other v1: 1090,1600 1170,1600 1230,1600 1310,1600 1090,1650 1170,1650 1230,1650 1310,1650
  other v2: 1863.71,1745 1863.71,1815 1863.71,1885 1863.71,1955
IRefCML2CMOS: U5.3 U5.4 X1.46 | length 373.8
  Top Layer w16: v1(1310,2500) 1440,2500 1460.1,2520.1 v3(1495.1,2520.1)
  Bottom Layer w16: X1.46 v1(1310,2500) ; v3@1495.1,2520.2 U5.4 U5.3
IRefCML2CMOS_ESD: C33.1 IC1.3 U5.1 U5.6 | length 709.3
  Top Layer w4: 1884.53,2112.36 1896.89,2100 IC1.3
  Top Layer w10: v4(1650,2400) 1687.36,2400 1777.36,2310 1865,2310 1884.53,2290.47 1884.53,2112.36
  Bottom Layer w10: U5.1@1607.4,2414.88 1622.28,2400 v4(1650,2400) 1686.29,2400 1694.32,2391.97 1694.41,2391.97 1706.29,2380.09 C33.1
  Bottom Layer w16: U5.1@1607.4,2414.88 U5.1 U5.6
IRefCTIA: U13.3 X2.23 | length 335.8
  Top Layer w16: v3(2510,1780) 2678.47,1948.47 2688.47,1948.47 v1(2690,1950)
  Bottom Layer w16: U13.3@2467.2,1780.39 U13.3 v3@2510,1780.2 ; v1(2690,1950) X2.23
IRefCTIA_ESD: C36.1 IC1.41 U13.1 | length 575.4
  Top Layer w4: IC1.41 2234,1996 2290,1940
  Top Layer w10: 2290,1940 2290,1845 2325,1810 v3(2350,1810)
  Bottom Layer w16: C36.1 2260.09,1753.71 2268.97,1762.59 2268.97,1778.97 2298.47,1808.47 2348.47,1808.47 v3(2350,1810) 2351.53,1808.47 2369.25,1808.47 2392.6,1785.12 U13.1
IRefLocalBuf: U12.4 X2.25 | length 323.5
  Top Layer w16: v3(2510,1859.61) 2650.39,2000 v1(2690,2000)
  Bottom Layer w16: U12.4@2467.2,1860 U12.4 v3@2510,1859.8 ; v1(2690,2000) X2.25
IRefLocalBuf_ESD: C35.1 IC1.40 U12.6 | length 510.3
  Top Layer w4: IC1.40 2261,2004 2310,1955 ; v3(2350,1850) v3@2351.55,1851.55
  Top Layer w10: 2310,1955 2350,1915 v3(2350,1850)
  Bottom Layer w16: C35.1 2268.89,1852.41 2275.94,1852.41 2278.34,1850 v3(2350,1850) 2351.53,1851.53 2380.78,1851.53 2381.3,1852.06 2389.77,1852.06 2392.6,1854.88 U12.6
IRefPadBuf: U12.3 X2.27 | length 302.7
  Top Layer w16: v3(2510,1960) 2600,2050 v1(2690,2050)
  Bottom Layer w16: U12.3@2467.2,1960.39 U12.3 v3@2510,1960.2 ; v1(2690,2050) X2.27
IRefPadBuf_ESD: C34.1 IC1.39 U12.1 | length 390.8
  Top Layer w4: IC1.39 2289.5,2012 2311.5,1990
  Top Layer w10: 2311.5,1990 v3(2350,1990)
  Bottom Layer w16: C34.1 2292.71,2000.91 2301.59,1992.03 2301.68,1992.03 2303.71,1990 v3(2350,1990) 2351.53,1988.47 2369.25,1988.47 2392.6,1965.12 U12.1
Phi_R_Fast: U16.3 X2.11 | length 550.4
  Top Layer w16: v3(2470,1280) 2620,1430 2620,1590 2678.47,1648.47 2688.47,1648.47 v1(2690,1650)
  Bottom Layer w16: U16.3 2468.7,1241.5 2468.7,1278.7 v3(2470,1280) ; v1(2690,1650) X2.11
Phi_R_Fast_ESD: IC1.49 U16.1 | length 863.5
  Top Layer w4: IC1.49 2108,1932 2120,1920
  Top Layer w10: 2120,1920 2120,1460 2310,1270 v3(2355,1270)
  Bottom Layer w16: v3(2355,1270) 2356.53,1268.47 2369.25,1268.47 2389.77,1247.94 2389.77,1243.02 U16.1
Phi_R_Slow: U14.4 X2.17 | length 415.8
  Top Layer w16: v3(2484.06,1548.56) 2505,1569.5 2505,1655 2650,1800 v1(2690,1800)
  Bottom Layer w16: U14.4 2470.23,1502.63 2470.23,1532.56 2484.06,1546.4 v3(2484.06,1548.56)
Phi_R_Slow_ESD: IC1.45 U14.6 | length 693.3
  Top Layer w4: IC1.45 2196,1964 2210,1950
  Top Layer w10: 2210,1950 2220,1940 2220,1620 v3(2350,1490)
  Bottom Layer w16: v3(2350,1490) 2352.16,1490 2357.77,1495.61 2389.77,1495.61 2392.6,1498.43 U14.6
Phi_RST_Fast: U15.4 X2.13 | length 484.1
  Top Layer w16: v3(2484.06,1368.56) 2585,1469.5 2585,1615 2669,1699 2689,1699 v1(2690,1700)
  Bottom Layer w16: U15.4 2470.23,1322.63 2470.23,1352.56 2484.06,1366.4 v3(2484.06,1368.56)
Phi_RST_Fast_ESD: IC1.48 U15.6 | length 816.2
  Top Layer w4: IC1.48 2140,1940 2150,1930
  Top Layer w10: 2150,1930 2150,1514.01 2354.01,1310 v3(2355,1310)
  Bottom Layer w16: v3(2355,1310) 2357.16,1310 2359.22,1312.06 2389.77,1312.06 2392.6,1314.88 U15.6
Phi_RST_Slow: U14.3 X2.19 | length 413.8
  Top Layer w16: v3(2470,1640) 2470,1680 2640,1850 v1(2690,1850)
  Bottom Layer w16: U14.3 2468.7,1601.5 2468.7,1638.7 v3(2470,1640) ; v1(2690,1850) X2.19
Phi_RST_Slow_ESD: IC1.44 U14.1 | length 590.4
  Top Layer w4: IC1.44 2228,1972 2255,1945
  Top Layer w10: 2255,1945 2255,1725 v3(2350,1630)
  Bottom Layer w16: v3(2350,1630) 2351.53,1628.47 2369.25,1628.47 2392.6,1605.12 U14.1
Phi_S_Fast: U16.4 X2.9 | length 552.4
  Top Layer w16: v3(2484.06,1188.56) 2655,1359.5 2655,1565 v1(2690,1600)
  Bottom Layer w16: U16.4 2470.23,1142.63 2470.23,1172.56 2484.06,1186.4 v3(2484.06,1188.56)
Phi_S_Fast_ESD: IC1.50 U16.6 | length 1005.1
  Top Layer w4: 2080,1910 2080,1924 IC1.50
  Top Layer w10: 2080,1910 2070,1900 2070,1360 2305,1125 v3(2355,1125)
  Bottom Layer w16: v3(2355,1125) 2357.16,1125 2364.22,1132.06 2389.77,1132.06 2392.6,1134.88 U16.6
Phi_S_Slow: U15.3 X2.15 | length 482.1
  Top Layer w16: v3(2470,1460) 2545,1535 2545,1635 2660,1750 v1(2690,1750)
  Bottom Layer w16: U15.3 2468.7,1421.5 2468.7,1458.7 v3(2470,1460) ; v1(2690,1750) X2.15
Phi_S_Slow_ESD: IC1.46 U15.1 | length 740.3
  Top Layer w4: IC1.46 2114,1956 2120,1950 2170,1950 2183.71,1936.29
  Top Layer w10: 2183.71,1936.29 2183.71,1576.29 2310,1450 v3(2350,1450)
  Bottom Layer w16: v3(2350,1450) 2351.53,1448.47 2369.25,1448.47 2392.6,1425.12 U15.1
SClkN: U11.4 X1.20 | length 285.9
  Top Layer w16: v1(1310,1850) 1350,1850 1400,1800 1495,1800 v3(1495.1,1800.1)
  Bottom Layer w16: X1.20 v1(1310,1850) ; v3@1495.1,1800.2 U11.4
SClkN_ESD: IC1.19 U11.6 | length 382.1
  Top Layer w4: 1789.41,1960 1801.41,1972 IC1.19
  Top Layer w10: v4(1640,1800) 1640.97,1800.97 1640.97,1811.56 1789.41,1960
  Bottom Layer w10: U11.6 1607.5,1800.1 1639.9,1800.1 v4(1640,1800)
SClkP: U7.3 X1.32 | length 302.5
  Top Layer w16: v1(1310,2150) 1350,2150 1440,2060 1494.8,2060 v3(1495.1,2059.7)
  Bottom Layer w16: X1.32 v1(1310,2150) ; v3@1495.1,2059.8 U7.3
SClkP_ESD: IC1.13 U7.1 | length 319
  Top Layer w4: 1773.26,2026.74 1780,2020 IC1.13
  Top Layer w10: v4(1650,2040) 1760,2040 1773.26,2026.74
  Bottom Layer w10: U7.1@1607.4,2054.88 1622.28,2040 v4(1650,2040)
SEnable: U9.3 X1.24 | length 294.2
  Top Layer w16: v1(1310,1950) 1350,1950 1420,1880 1494.8,1880 v3(1495.1,1879.7)
  Bottom Layer w16: X1.24 v1(1310,1950) ; v3@1495.1,1879.8 U9.3
SEnable_ESD: IC1.17 U9.1 | length 354
  Top Layer w4: 1757.25,1977.25 1768,1988 IC1.17
  Top Layer w10: v4(1630.04,1910.31) 1690.31,1910.31 1757.25,1977.25
  Bottom Layer w10: U9.1 1607.4,1884.72 1628.89,1906.21 1628.89,1909.17 v4(1630.04,1910.31)
SIn: U11.3 X1.16 | length 286
  Top Layer w16: v1(1310,1750) 1350,1750 1400,1700 1494.8,1700 v3(1495.1,1699.7)
  Bottom Layer w16: X1.16 v1(1310,1750) ; v3@1495.1,1699.8 U11.3
SIn_ESD: IC1.21 U11.1 | length 415.3
  Top Layer w4: 1829.72,1930 1860,1930 1886,1956 IC1.21
  Top Layer w10: v4(1630.04,1730.31) 1829.72,1930
  Bottom Layer w10: U11.1 1607.4,1704.72 1628.89,1726.21 1628.89,1729.17 v4(1630.04,1730.31)
SiteAddr<0>: U6.4 X2.39 | length 243.4
  Top Layer w16: v3(2510,2399.61) 2559.61,2350 v1(2690,2350)
  Bottom Layer w16: U6.4@2467.2,2400 U6.4 v3@2510,2399.8
SiteAddr<0>_ESD: IC1.31 U6.6 | length 556
  Top Layer w4: IC1.31 2156,2076 2160,2080 2245,2080 2280,2115
  Top Layer w10: 2280,2115 2310,2145 2310,2345 v3(2335,2370)
  Bottom Layer w16: v3(2335,2370) 2364.9,2399.9 2389.77,2399.9 2389.87,2399.8 U6.6
SiteAddr<1>: U4.4 X2.43 | length 318.9
  Top Layer w16: v3(2510,2579.61) 2639.61,2450 v1(2690,2450)
  Bottom Layer w16: U4.4 2467.5,2579.7 2509.9,2579.7 v3(2510,2579.61) ; v1(2690,2450) X2.43
SiteAddr<1>_ESD: IC1.29 U4.6 | length 682.5
  Top Layer w4: IC1.29 2132,2092 2140,2100 2185,2100 2200,2115
  Top Layer w10: 2200,2115 2205,2120 2205,2420 v3(2335,2550)
  Bottom Layer w16: v3(2335,2550) 2364.9,2579.9 2389.77,2579.9 2389.87,2579.8 U4.6
SiteAddr<2>: U2.4 X2.47 | length 369.3
  Top Layer w16: v3(2510,2759.61) 2555,2714.61 2555,2685 v1(2690,2550)
  Bottom Layer w16: U2.4 v3@2510,2759.8 ; v1(2690,2550) X2.47
SiteAddr<2>_ESD: IC1.27 U2.6 | length 803.7
  Top Layer w4: IC1.27 2101.9,2108 2115,2121.1
  Top Layer w10: 2115,2121.1 2115,2512.18 v3(2346.82,2744)
  Bottom Layer w16: v3(2346.82,2744) 2362.62,2759.8 U2.6
SOut: U1.3 X1.50 | length 223
  Top Layer w16: v1(1310,2600) 1310.15,2599.85 1494.95,2599.85 v3(1495.1,2599.7)
  Bottom Layer w16: X1.50 X1.50@1267.58,2599.9 ; v3(1495.1,2599.7) 1495.15,2599.75 1532.35,2599.75 1532.5,2599.9 U1.3
SOut_ESD: IC1.1 U1.1 | length 702.9
  Top Layer w4: IC1.1 1920,2116 1920,2130.5
  Top Layer w10: v4(1650,2580) 1770,2580 1920,2430 1920,2130.5
  Bottom Layer w10: U1.1@1607.4,2594.88 1622.28,2580 v4(1650,2580)
SReset: U9.4 X1.28 | length 294.2
  Top Layer w16: v1(1310,2050) 1350,2050 1420,1980 1495,1980 v3(1495.1,1980.1)
  Bottom Layer w16: X1.28 v1(1310,2050) ; v3@1495.1,1980.2 U9.4
SReset_ESD: IC1.15 U9.6 | length 314.6
  Top Layer w4: 1724,2004 IC1.15
  Top Layer w10: v4(1640,1980) 1664,2004 1724,2004
  Bottom Layer w10: U9.6 1607.5,1980.1 1639.9,1980.1 v4(1640,1980)
SUpdate: U7.4 X1.36 | length 302.5
  Top Layer w16: v1(1310,2250) 1350,2250 1440,2160 v3(1495,2160)
  Bottom Layer w16: X1.36 v1(1310,2250) ; v3(1495,2160) 1495.1,2160.1 1532.5,2160.1 U7.4
SUpdate_ESD: IC1.11 U7.6 | length 373.8
  Top Layer w4: 1797.91,2047.09 1809,2036 IC1.11
  Top Layer w10: v4(1630,2160) 1630,2129.72 1673.66,2086.06 1758.94,2086.06 1797.91,2047.09
  Bottom Layer w10: U7.6 1607.5,2160.1 1629.9,2160.1 v4(1630,2160)
VDD: C9.1 C10.1 C11.1 C12.1 C17.1 C19.1 C21.1 C23.1 C25.1 C27.1 IC1.8 IC1.10 U1.5 U3.5 U5.5 U7.5 U9.5 U11.5 X1.3 X1.4 X1.5 X1.6 | length 1142.9
  Top Layer w4: IC1.10 1889.25,2044 1883.25,2050 v2(1880,2050) 1890,2060 IC1.8
  Top Layer w16: v2(1855,2050) v2(1880,2050)
  Bottom Layer w12: v1(1570,1770) v1@1570.35,1769.65 ; v1(1570,1950) v1@1570.35,1949.65 ; v1(1570,2130) v1@1570.35,2129.65 ; U3.5 1570,2345.12 1594.88,2370 1638.31,2370 1675,2333.31 C21.1 ; U5.5 1570,2525.12 1594.88,2550 1638.31,2550 1675,2513.31 C19.1 ; C27.1@1674.65,1769.65 C27.1 ; C25.1@1674.65,1949.65 C25.1 ; C23.1@1674.65,2129.65 C23.1
  Bottom Layer w16: v1@1570.35,1769.65 C27.1@1674.65,1769.65 ; v1@1570.35,1949.65 C25.1@1674.65,1949.65 ; v1@1570.35,2129.65 C23.1@1674.65,2129.65 ; v1@1570.35,2669.65 C17.1@1674.65,2669.65
  Bottom Layer w20: v1(1570,1770) U11.5 ; v1(1570,1950) U9.5 ; v1(1570,2130) U7.5 ; v1(1570,2310) U3.5 ; v1(1570,2490) U5.5 ; U1.5 v1(1570,2670) v1@1570.35,2669.65 ; C17.1@1674.65,2669.65 C17.1 ; v2(1816.18,2135) 1816.18,2088.82 v2(1855,2050) v2(1880,2050)
  other v1: 1090,1450 1170,1450 1230,1450 1310,1450 1090,1500 1170,1500 1230,1500 1310,1500
  other v2: 1816.18,2205 1816.18,2275 1816.18,2345
VPD_ANODE: C13.1 C14.1 C15.1 C16.1 IC1.35 X2.1 X2.2 | length 1933.1
  Top Layer w4: IC1.35 2111.66,2044 2117.66,2050 v2(2120,2050)
  Bottom Layer w16: v2(2120,2050) 2120,2035 2174.82,1980.18 2174.82,1963.89 C13.1 C14.1 C15.1 C16.1 2183.71,1116.29 2255,1045 2470,1045 2685,1260 2685,1393.43 2691.57,1400 X2.2
  other v1: 2690,1400 2910,1400
pads on no net: U1.4 U1.6 U8.4 U8.6 U13.4 U13.6 X1.MH1 X1.MH2 X2.MH1 X2.MH2

## Polygon pours and split planes (outlines as drawn)
GND on MidLayer 1 "MID1_GND" (solid, pour order 4): 1000,1090 ccw(c1090,1090) 1090,1000 1975,1000 1975,1750 2040,1815 2040,2185 1975,2250 1975,3000 1090,3000 ccw(c1090,2910) 1000,2910
GNDA on MidLayer 1 "MID1_GNDA" (solid, pour order 2): 2910,1000 ccw(c2910,1090) 3000,1090 3000,2910 ccw(c2910,2910) 2910,3000 2025,3000 2025,2275 2050,2250 2050,1750 2025,1725 2025,1000
VDD on MidLayer 2 "MID2_VDD" (solid, pour order 1): 1000,1090 ccw(c1090,1090) 1090,1000 1975,1000 1975,1750 2040,1815 2040,2185 1975,2250 1975,3000 1090,3000 ccw(c1090,2910) 1000,2910
AVDD on MidLayer 2 "MID2_AVDD" (solid, pour order 8): 2910,1000 ccw(c2910,1090) 3000,1090 3000,2910 ccw(c2910,2910) 2910,3000 2025,3000 2025,2275 2050,2250 2050,1750 2025,1725 2025,1000
HVDD on MidLayer 2 "MID2_HVDD" (solid, pour order 0): 1040,1670 1055,1685 1810.15,1685 1840,1714.85 1840,1966.12 1877.88,2004 1959.78,2004 1970,1993.78 1970,1905 1915,1850 1915,1675 1810,1570 1055,1570 1040,1585
GND on Bottom Layer "BOT_GND" (solid, pour order 7): 1000,1090 ccw(c1090,1090) 1090,1000 1975,1000 1975,1750 2040,1815 2040,2185 1975,2250 1975,3000 1090,3000 ccw(c1090,2910) 1000,2910
GNDA on Bottom Layer "BOT_GNDA" (solid, pour order 5): 2910,1000 ccw(c2910,1090) 3000,1090 3000,2910 ccw(c2910,2910) 2910,3000 2025,3000 2025,2275 2050,2250 2050,1750 2025,1725 2025,1000
GND on Top Layer "TOP_GND" (solid, pour order 9): 1000,1090 ccw(c1090,1090) 1090,1000 1975,1000 1975,1750 2040,1815 2040,2185 1975,2250 1975,3000 1090,3000 ccw(c1090,2910) 1000,2910
GNDA on Top Layer "TOP_GNDA" (solid, pour order 10): 2910,1000 ccw(c2910,1090) 3000,1090 3000,2910 ccw(c2910,2910) 2910,3000 2025,3000 2025,2275 2050,2250 2050,1750 2025,1725 2025,1000

## Silkscreen, mask and mechanical layers (free items; w line width, h text height)
Top Overlay:
  text "CTIAAddr<3>" at 2107.64,2885 h40
  text "EQuIP CENA Chip Board / v1.0" at 1375,2825 h60
  text "SiteAddr<2>" at 2069.46,2739 h40
  text "CTIAAddr<2>" at 2112.68,2690.04 h40
  text "SOut" at 1460,2620 h40
  text "SiteAddr<1>" at 2057.64,2545 h40
  text "CTIAAddr<1>" at 2112.68,2500.23 h40
  text "IRefCML2CMOS" at 1460,2475 h40
  text "SiteAddr<0>" at 2057.64,2365 h40
  text "CTIAAddr<0>" at 2112.68,2320.23 h40
  text "HSClkN" at 1630.04,2309.68 h40
  text "HSClkP" at 1630,2245 h40
  text "SUpdate" at 1459.95,2180.34 h40
  text "CTIAOutP" at 2112.68,2140.23 h40
  text "SClkP" at 1459.66,2080.25 h40
  text "CTIAOutN" at 2072.64,2025 h40
  text "SClkN" at 1459.85,2000.25 h40
  text "IRefPadBuf" at 2072.64,1985 h40
  text "SEnable" at 1459.66,1900.25 h40
  text "IRefLocalBuf" at 2072.64,1845 h40
  text "SClkN" at 1459.85,1820.25 h40
  text "IRefCTIA" at 2072.64,1805 h40
  text "SIn" at 1459.95,1719.95 h40
  text "Phi_RST_Slow" at 2072.64,1625 h40
  text "Phi_R_Slow" at 2072.64,1485 h40
  text "Phi_S_Slow" at 2072.64,1440 h40
  text "Phi_RST_Fast" at 2077.64,1305 h40
  text "Phi_R_Fast" at 2077.64,1260 h40
  text "Phi_S_Fast" at 2077.64,1120 h40
  text "kramnik@berkeley.edu / vlada@berkeley.edu" at 1375,1050 h60
Mechanical 1:
  lines w1: 1000,1090.15 ccw(c1090.15,1090.15) 1090.15,1000 2909.85,1000 ccw(c2909.85,1090.15) 3000,1090.15 3000,2909.85 ccw(c2909.85,2909.85) 2909.85,3000 1090.15,3000 ccw(c1090.15,2909.85) 1000,2909.85 1000,1090.15

## Text inside footprints (layer, text, board x,y; h text height)
X1: Mechanical 40 "30.480" at 1420,1968.5 h15.5 r270; Mechanical 40 "33.655" at 1022.52,1968.5 h15.5 r270; Mechanical 40 "34.925" at 922.52,1968.5 h15.5 r270; Mechanical 40 "1.270" at 1380,1296.5 h15.5 r270; Mechanical 40 "1.587" at 980,1249.02 h15.5 r270; Mechanical 40 "1.714" at 1037.48,1204.02 h15.5 r270; Mechanical 40 "5.715" at 1195,1041.5 h15.5 r270; Mechanical 40 "3.429" at 1195,1111.5 h15.5 r270
X2: Mechanical 40 "3.429" at 2795,1111.5 h15.5 r270; Mechanical 40 "5.715" at 2795,1041.5 h15.5 r270; Mechanical 40 "1.714" at 2637.48,1204.02 h15.5 r270; Mechanical 40 "1.587" at 2580,1249.02 h15.5 r270; Mechanical 40 "1.270" at 2980,1296.5 h15.5 r270; Mechanical 40 "34.925" at 2522.52,1968.5 h15.5 r270; Mechanical 40 "33.655" at 2622.52,1968.5 h15.5 r270; Mechanical 40 "30.480" at 3020,1968.5 h15.5 r270